# EAGLE board main (EAGLE 8.4.1)
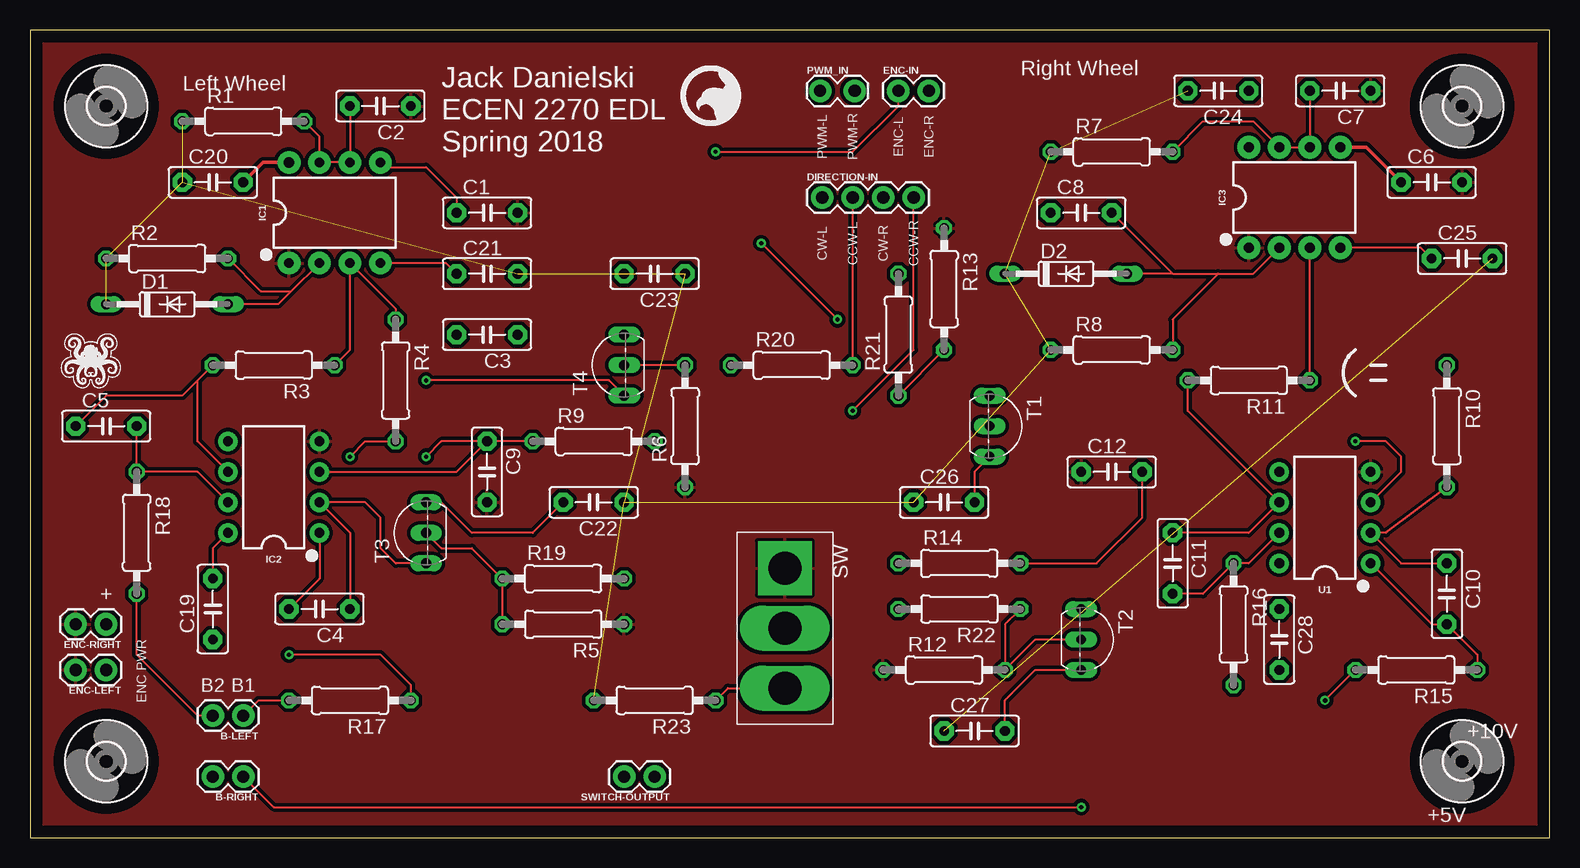
[diagram p0: board, top side]
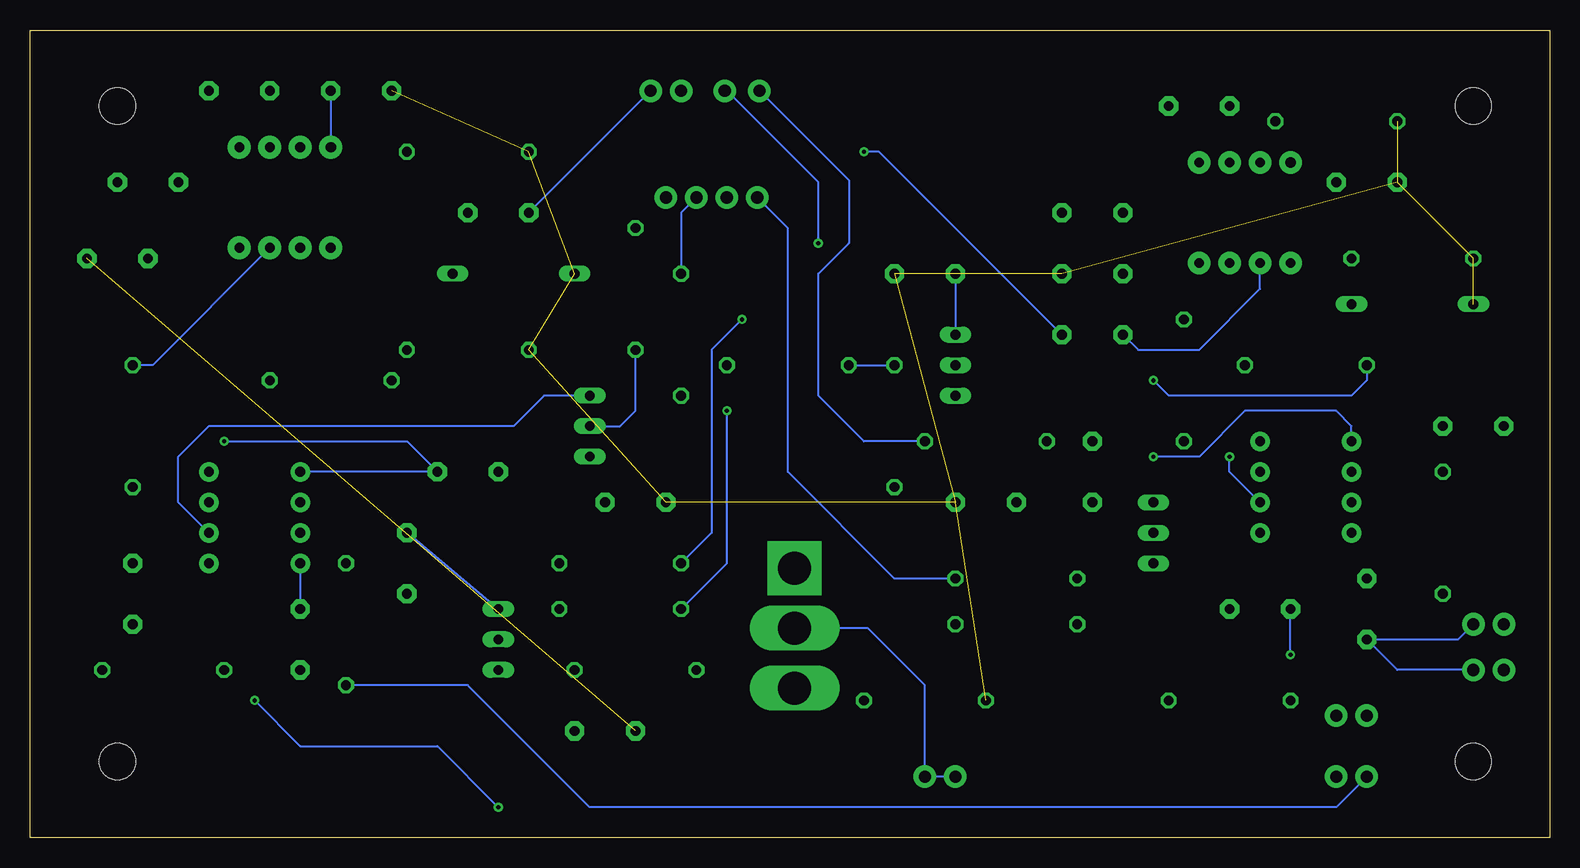
[diagram p1: board, bottom side, seen from below]

Size 126.67 x 67.3 mm. Coordinates in mm from the lower left corner, seen from the top.
Outline: 0,0 126.67,0 126.67,67.3 0,67.3 0,0
Copper layers (1*16): Top 0.035mm / dielectric 1.5mm / Bottom 0.035mm
Design rules "default": minimum track width 6mil, minimum drill 0.35mm, track to track 6mil, track to pad 6mil, pad to pad 6mil, via to via 6mil, smd to smd 6mil, copper to edge 40mil, drill to drill 6mil, minimum pad ring 10mil, minimum via ring 8mil, stop-mask expansion 4mil, vias tented up to drill 0mil, thermal gap 10mil

## Footprints (pad centres in the part's own frame; a part is rotated, then mirrored left to right if it is on the bottom)
1X02 = drill 1.016 pad 1.88: 1 0,0; 2 2.54,0
C5B2.5 = drill 0.813 pad 1.6 octagon: 1 -2.54,0; 2 2.54,0
DO35-10 = drill 0.813 long: A 5.08,0; C -5.08,0
1X04 = drill 1.016 pad 1.88: 1 0,0; 2 2.54,0; 3 5.08,0; 4 7.62,0
DIP08-KIT = drill 0.813 pad 1.905: 1 -3.81,-4.191; 2 -1.27,-4.191; 3 1.27,-4.191; 4 3.81,-4.191; 5 3.81,4.191; 6 1.27,4.191; 7 -1.27,4.191 | drill 0.864 pad 1.905: 8 -3.81,4.191
DIP08 = drill 0.813 pad 1.626: 1 -3.81,-3.81; 2 -1.27,-3.81; 3 1.27,-3.81; 4 3.81,-3.81; 5 3.81,3.81; 6 1.27,3.81; 7 -1.27,3.81; 8 -3.81,3.81
1X02_LOCK = drill 1.016 pad 1.88: 1 -0.178,0; 2 2.718,0
0207/10 = drill 0.813 octagon: 1 -5.08,0; 2 5.08,0
TO92-CBE = drill 0.813 long: B 0,0; C -2.54,0; E 2.54,0
3,0 = hole 3: 0,0
SWITCH = drill 2.75 pad 4.5 square: P$1 -13.57,3.23 | drill 2.75 pad 3.25 long: P$2 -8.57,3.23; P$3 -3.57,3.23

## Placement (x,y rotation side)
B-LEFT  [1X02]  17.78,10.16 180 top
B-RIGHT  [1X02]  17.78,5.08 180 top
C1  [C5B2.5]  38.1,52.07 0 top
C2  [C5B2.5]  29.21,60.96 180 top
C3  1nF  [C5B2.5]  38.1,41.91 180 top
C4  100nF  [C5B2.5]  24.13,19.05 180 top
C5  100nF  [C5B2.5]  6.35,34.29 0 top
C6  1uF  [C5B2.5]  116.84,54.61 0 top
C7  100nF  [C5B2.5]  109.22,62.23 180 top
C8  1nF  [C5B2.5]  87.63,52.07 0 top
C9  1uF  [C5B2.5]  38.1,30.48 270 top
C10  100nF  [C5B2.5]  118.11,20.32 270 top
C11  100nF  [C5B2.5]  95.25,22.86 270 top
C12  1uF  [C5B2.5]  90.17,30.48 0 top
C19  [C5B2.5]  15.24,19.05 90 top
C20  [C5B2.5]  15.24,54.61 0 top
C21  [C5B2.5]  38.1,46.99 0 top
C22  [C5B2.5]  46.99,27.94 180 top
C23  [C5B2.5]  52.07,46.99 180 top
C24  [C5B2.5]  99.06,62.23 180 top
C25  [C5B2.5]  119.38,48.26 0 top
C26  [C5B2.5]  76.2,27.94 0 top
C27  [C5B2.5]  78.74,8.89 0 top
C28  [C5B2.5]  104.14,16.51 270 top
D1  1N4148DO35-10  [DO35-10]  11.43,44.45 0 top
D2  1N4148DO35-10  [DO35-10]  86.36,46.99 0 top
DIRECTION-IN  [1X04]  66.04,53.34 0 top
ENC-IN  [1X02]  72.39,62.23 0 top
ENC-LEFT  [1X02]  6.35,13.97 180 top
ENC-RIGHT  [1X02]  6.35,17.78 180 top
IC1  555  [DIP08-KIT]  25.4,52.07 0 top
IC2  LM358  [DIP08]  20.32,29.21 90 top
IC3  555  [DIP08-KIT]  105.41,53.34 0 top
PWM_IN  [1X02_LOCK]  66.04,62.23 0 top
R1  6.3k  [0207/10]  17.78,59.69 0 top
R2  4.7k  [0207/10]  11.43,48.26 0 top
R3  68k  [0207/10]  20.32,39.37 180 top
R4  68k  [0207/10]  30.48,38.1 270 top
R5  22k  [0207/10]  44.45,17.78 180 top
R6  22k  [0207/10]  54.61,34.29 90 top
R7  6.3k  [0207/10]  90.17,57.15 0 top
R8  4.7k  [0207/10]  90.17,40.64 0 top
R9  68k  [0207/10]  46.99,33.02 0 top
R10  68k  [0207/10]  118.11,34.29 270 top
R11  68k  [0207/10]  101.6,38.1 180 top
R12  22k  [0207/10]  76.2,13.97 0 top
R13  22k  [0207/10]  76.2,45.72 270 top
R14  68k  [0207/10]  77.47,22.86 0 top
R15  680  [0207/10]  115.57,13.97 180 top
R16  680  [0207/10]  100.33,17.78 270 top
R17  [0207/10]  26.67,11.43 180 top
R18  [0207/10]  8.89,25.4 270 top
R19  1k  [0207/10]  44.45,21.59 0 top
R20  1k  [0207/10]  63.5,39.37 0 top
R21  1k  [0207/10]  72.39,41.91 90 top
R22  1k  [0207/10]  77.47,19.05 180 top
R23  [0207/10]  52.07,11.43 180 top
SWITCH-OUTPUT  [1X02]  52.07,5.08 180 top
T1  [TO92-CBE]  80.01,34.29 270 top
T2  [TO92-CBE]  87.63,16.51 270 top
T3  [TO92-CBE]  33.02,25.4 90 top
T4  [TO92-CBE]  49.53,39.37 90 top
U1  LM358  [DIP08]  107.95,26.67 90 top
U$1  [3,0]  6.35,6.35 0 top
U$2  SWITCH  [SWITCH]  59.69,8.89 270 top
U$3  [CS-2016-LOGO-5MM]  53.34,58.42 0 top
U$4  [SFE_LUDUS-S]  5.08,39.37 0 top
U$5  [3,0]  6.35,60.96 0 top
U$6  [3,0]  119.38,60.96 0 top
U$7  [3,0]  119.38,6.35 0 top

## Library data of the parts
B-LEFT B-RIGHT ENC-IN SWITCH-OUTPUT = SparkFun-Retired
C1-C12 C19-C28 = capacitor-wima
D1 D2 = diode
DIRECTION-IN = SparkFun-Connectors; PROD_ID: CONN-09696
ENC-LEFT ENC-RIGHT PWM_IN = SparkFun-Connectors
IC1 IC3 = SparkFun-IC-Special-Function; PROD_ID: IC-09173; PROD_ID_ALT: IC-11930
IC2 U1 = SparkFun-IC-Amplifiers; PROD_ID: IC-09172
R1-R23 = resistor
T1-T4 = transistor
U$1 U$5-U$7 = holes
U$2 = mySwitch
U$3 = logo
U$4 = SparkFun-Aesthetics

## Nets
+5VCC: C20.1 C21.2 C22.1 C23.1 C24.2 C26.1 D1.C D2.C R1.1 R2.1 R7.1 R8.1 R23.2
+10VCC: C28.2
ARDUINO_CCW_LEFT: R6.2 R20.1 T4.B
ARDUINO_CCW_RIGHT: R12.2 R22.1 T2.B
ARDUINO_CW_LEFT: R5.2 R19.1 T3.B
ARDUINO_CW_RIGHT: R13.2 R21.1 T1.B
ARDUINO_PWM_LEFT: PWM_IN.1 R9.2
ARDUINO_PWM_RIGHT: PWM_IN.2 R14.1
B1_RIGHT: B-RIGHT.1 R15.2
B1L: C4.2 IC2.1 R17.1
B1R: C10.2 R15.1 U1.1
B2_LEFT: B-LEFT.2 R18.2
B2_RIGHT: B-RIGHT.2 R16.2
B2L: C5.2 IC2.7 R18.1
B2R: C11.2 R16.1 U1.7
B-LEFT: B-LEFT.1 R17.2
ENC_LEFT: C3.1 ENC-IN.1
ENC_RIGHT: C8.1 ENC-IN.2
GND: C1.2 C2.1 C6.2 C7.1 C9.2 C12.1 ENC-LEFT.2 ENC-RIGHT.2 IC1.1 IC2.4 IC3.1 R5.1 R6.1 R12.1 R13.1 U1.4 U$2.P$1
N$1: C1.1 IC1.5
N$2: C22.2 T3.E
N$3: C4.1 IC2.2 R4.2 T3.C
N$4: C2.2 IC1.6 IC1.7 R1.2
N$5: C23.2 T4.E
N$6: C5.1 IC2.6 R3.2 T4.C
N$7: C3.2 D1.A IC1.2 R2.2
N$8: C10.1 R10.2 T1.C U1.2
N$9: C24.1 IC3.8
N$10: C26.2 T1.E
N$11: C6.1 IC3.5
N$12: C7.2 IC3.6 IC3.7 R7.2
N$13: C8.2 D2.A IC3.2 R8.2
N$14: C11.1 R11.2 T2.C U1.6
N$15: C19.2 IC2.8
N$16: DIRECTION-IN.1 R19.2
N$17: DIRECTION-IN.2 R20.2
N$18: DIRECTION-IN.3 R21.2
N$19: DIRECTION-IN.4 R22.2
N$20: C27.2 T2.E
N$21: C25.1 IC3.4
N$23: R23.1 U$2.P$3
N$24: C28.1 U1.8
N$27: SWITCH-OUTPUT.1 SWITCH-OUTPUT.2 U$2.P$2
PWR_L: C20.2 IC1.8
RES: C21.1 IC1.4
S$1: C19.1 ENC-LEFT.1 ENC-RIGHT.1
S$2: C25.2 C27.1
SENSE_LEFT: IC1.3 R3.1 R4.1
SENSE_RIGHT: IC3.3 R10.1 R11.1
VREF_LEFT: C9.1 IC2.3 IC2.5 R9.1
VREF_RIGHT: C12.2 R14.2 U1.3 U1.5

## Tracks (layer width: path | path; a pad name or v marks a point on that pad's centre or on a via)
+5VCC  (12 unrouted)
  Top 0.152: R23.2 46.85,11.3
ARDUINO_CCW_LEFT
  Top 0.152: R6.2 T4.B
  Bottom 0.152: R20.1 R6.2
ARDUINO_CCW_RIGHT
  Top 0.152: R22.1 81.28,17.78 R12.2 83.82,16.51 T2.B
ARDUINO_CW_LEFT
  Top 0.152: T3.B 34.29,24.13 36.83,24.13 R19.1 R5.2
ARDUINO_CW_RIGHT
  Top 0.152: R21.1 R13.2
  Bottom 0.152: T1.B 77.47,34.29 76.2,35.56 R13.2
ARDUINO_PWM_LEFT
  Bottom 0.152: R9.2 57.15,33.02 60.96,36.83 60.96,46.99 58.42,49.53 58.42,54.79 PWM_IN.1
ARDUINO_PWM_RIGHT  (via drill 0.35)
  Top 0.152: v67.31,43.18 v60.96,49.53
  Bottom 0.152: v67.31,43.18 69.85,40.64 69.85,25.4 R14.1 | v60.96,49.53 60.96,54.61 68.58,62.23 PWM_IN.2
B1_RIGHT  (via drill 0.35)
  Top 0.152: B-RIGHT.1 20.32,2.54 v87.63,2.54 | R15.2 v107.95,11.43
  Bottom 0.152: v87.63,2.54 92.71,7.62 104.14,7.62 v107.95,11.43
B1L  (via drill 0.35)
  Top 0.152: C4.2 24.13,21.59 IC2.1 | R17.1 31.75,12.7 29.21,15.24 v21.59,15.24
  Bottom 0.152: v21.59,15.24 C4.2
B1R
  Top 0.152: U1.1 116.84,17.78 C10.2 120.65,15.24 R15.1
B2_LEFT
  Top 0.152: B-LEFT.2 13.97,10.16 8.89,15.24 R18.2
B2_RIGHT
  Bottom 0.152: B-RIGHT.2 17.78,2.54 80.01,2.54 90.17,12.7 R16.2
B2L
  Top 0.152: C5.2 R18.1 13.97,30.48 IC2.7
B2R
  Top 0.152: U1.7 101.6,22.86 R16.1 97.79,20.32 C11.2
B-LEFT
  Top 0.152: B-LEFT.1 19.05,11.43 R17.2
ENC_LEFT  (via drill 0.35)
  Top 0.152: v57.15,57.15 68.58,57.15 72.39,60.96 ENC-IN.1
  Bottom 0.152: C3.1 55.88,57.15 v57.15,57.15
ENC_RIGHT
  Bottom 0.152: ENC-IN.2 C8.1
GND
  pour Top (isolate 0.305): 0,67.31 0,0 125.73,0 125.73,67.31
N$1
  Top 0.152: IC1.5 29.59,55.88 33.02,55.88 35.56,53.34 C1.1
N$2
  Top 0.152: C22.2 41.91,25.4 36.83,25.4 34.29,27.94 T3.E
N$3  (via drill 0.35)
  Top 0.152: v26.67,31.75 27.94,33.02 R4.2 | C4.1 26.67,25.4 IC2.2 27.94,27.94 29.21,26.67 29.21,24.13 30.48,22.86 T3.C
  Bottom 0.152: IC2.2 26.67,30.48 v26.67,31.75
N$4
  Top 0.152: C2.2 IC1.6 IC1.7 24.13,58.42 R1.2
N$5
  Bottom 0.152: C23.2 T4.E
N$6  (via drill 0.35)
  Top 0.152: IC2.6 13.97,33.02 13.97,38.1 | 13.97,38.1 R3.2 | T4.C 48.26,38.1 v33.02,38.1 | 13.97,38.1 12.7,36.83 6.35,36.83 C5.1
  Bottom 0.152: v33.02,38.1 31.75,36.83 16.51,36.83 15.24,38.1 R3.2
N$7
  Top 0.152: 21.78,45.53 IC1.2 | 21.78,45.53 20.7,44.45 D1.A | R2.2 19.24,45.53 21.78,45.53
  Bottom 0.152: C3.2 34.29,40.64 29.21,40.64 24.13,45.72 IC1.2
N$8
  Top 0.152: R10.2 113.03,25.4 U1.2 114.3,22.86 C10.1
  Bottom 0.152: U1.2 114.3,27.94 114.3,31.75 111.76,34.29 86.36,34.29 83.82,36.83 T1.C
N$9
  Bottom 0.152: C24.1 IC3.8
N$10
  Top 0.152: T1.E 78.74,30.48 C26.2
N$11
  Top 0.305: C6.1 111.38,57.53 IC3.5
N$12
  Top 0.152: C7.2 IC3.6 IC3.7 101.98,59.69 97.79,59.69 R7.2
N$13
  Top 0.152: IC3.2 101.98,46.99 99.06,46.99 | 95.25,46.99 D2.A | C8.2 95.25,46.99 | 95.25,46.99 99.06,46.99 | 99.06,46.99 95.25,43.18 R8.2
N$14
  Top 0.152: R11.2 96.52,35.56 U1.6 101.6,25.4 C11.1
  Bottom 0.152: T2.C C11.1
N$15
  Top 0.152: IC2.8 15.24,24.13 C19.2
N$16
  Bottom 0.152: DIRECTION-IN.1 63.5,50.8 63.5,30.48 54.61,21.59 R19.2
N$17
  Top 0.152: DIRECTION-IN.2 R20.2
N$18
  Bottom 0.152: DIRECTION-IN.3 72.39,52.07 R21.2
N$19  (via drill 0.35)
  Top 0.152: v68.58,35.56 73.66,40.64 DIRECTION-IN.4
  Bottom 0.152: R22.2 68.58,22.86 v68.58,35.56
N$20
  Top 0.152: C27.2 81.28,11.43 83.82,13.97 T2.E
N$21
  Top 0.152: C25.1 115.95,49.15 IC3.4
N$23
  Top 0.152: R23.1 58.18,12.46 U$2.P$3
N$24
  Bottom 0.152: U1.8 C28.1
N$27
  Bottom 0.152: U$2.P$2 56.83,17.46 52.07,12.7 SWITCH-OUTPUT.1 SWITCH-OUTPUT.2
PWR_L
  Top 0.305: C20.2 19.43,56.26 IC1.8
RES
  Top 0.152: C21.1 34.67,47.88 IC1.4
S$1
  Bottom 0.152: ENC-RIGHT.1 7.62,16.51 C19.1 12.7,13.97 ENC-LEFT.1
S$2  (1 unrouted)
SENSE_LEFT
  Top 0.152: R3.1 26.67,40.64 IC1.3 30.48,44.07 R4.1
SENSE_RIGHT
  Top 0.152: R11.1 IC3.3
  Bottom 0.152: IC3.3 116.46,39.37 R10.1
VREF_LEFT  (via drill 0.35)
  Top 0.152: R9.1 C9.1 | IC2.3 35.56,30.48 C9.1 | C9.1 34.29,33.02 v33.02,31.75
  Bottom 0.152: IC2.5 16.51,34.29 17.78,35.56 25.4,35.56 29.21,31.75 v33.02,31.75
VREF_RIGHT  (via drill 0.35)
  Top 0.152: U1.3 114.3,30.48 114.3,31.75 113.03,33.02 v110.49,33.02 | R14.2 88.9,22.86 92.71,26.67 C12.2
  Bottom 0.152: U1.5 C12.2 95.25,33.02 v110.49,33.02

## Text on the board
tPlace: Right Wheel | Left Wheel | PWM-L | PWM-R | ENC-L | ENC-R | Jack Danielski / ECEN 2270 EDL / Spring 2018 | CW-L | CCW-L | CW-R | CCW-R | + | ENC PWR | B2 | B1 | +10V | +5V